# Altium PCB PCB_WeatherStation.PcbDoc (part 2 of 3)
Units mil, origin at the board's own origin, x right, y up, seen from the top; angles counter-clockwise.
Board outline 3900 x 3900 mil, 2 copper layers (Top Layer, Bottom Layer); 99 components, 57 nets, 297 pads, 308 vias.
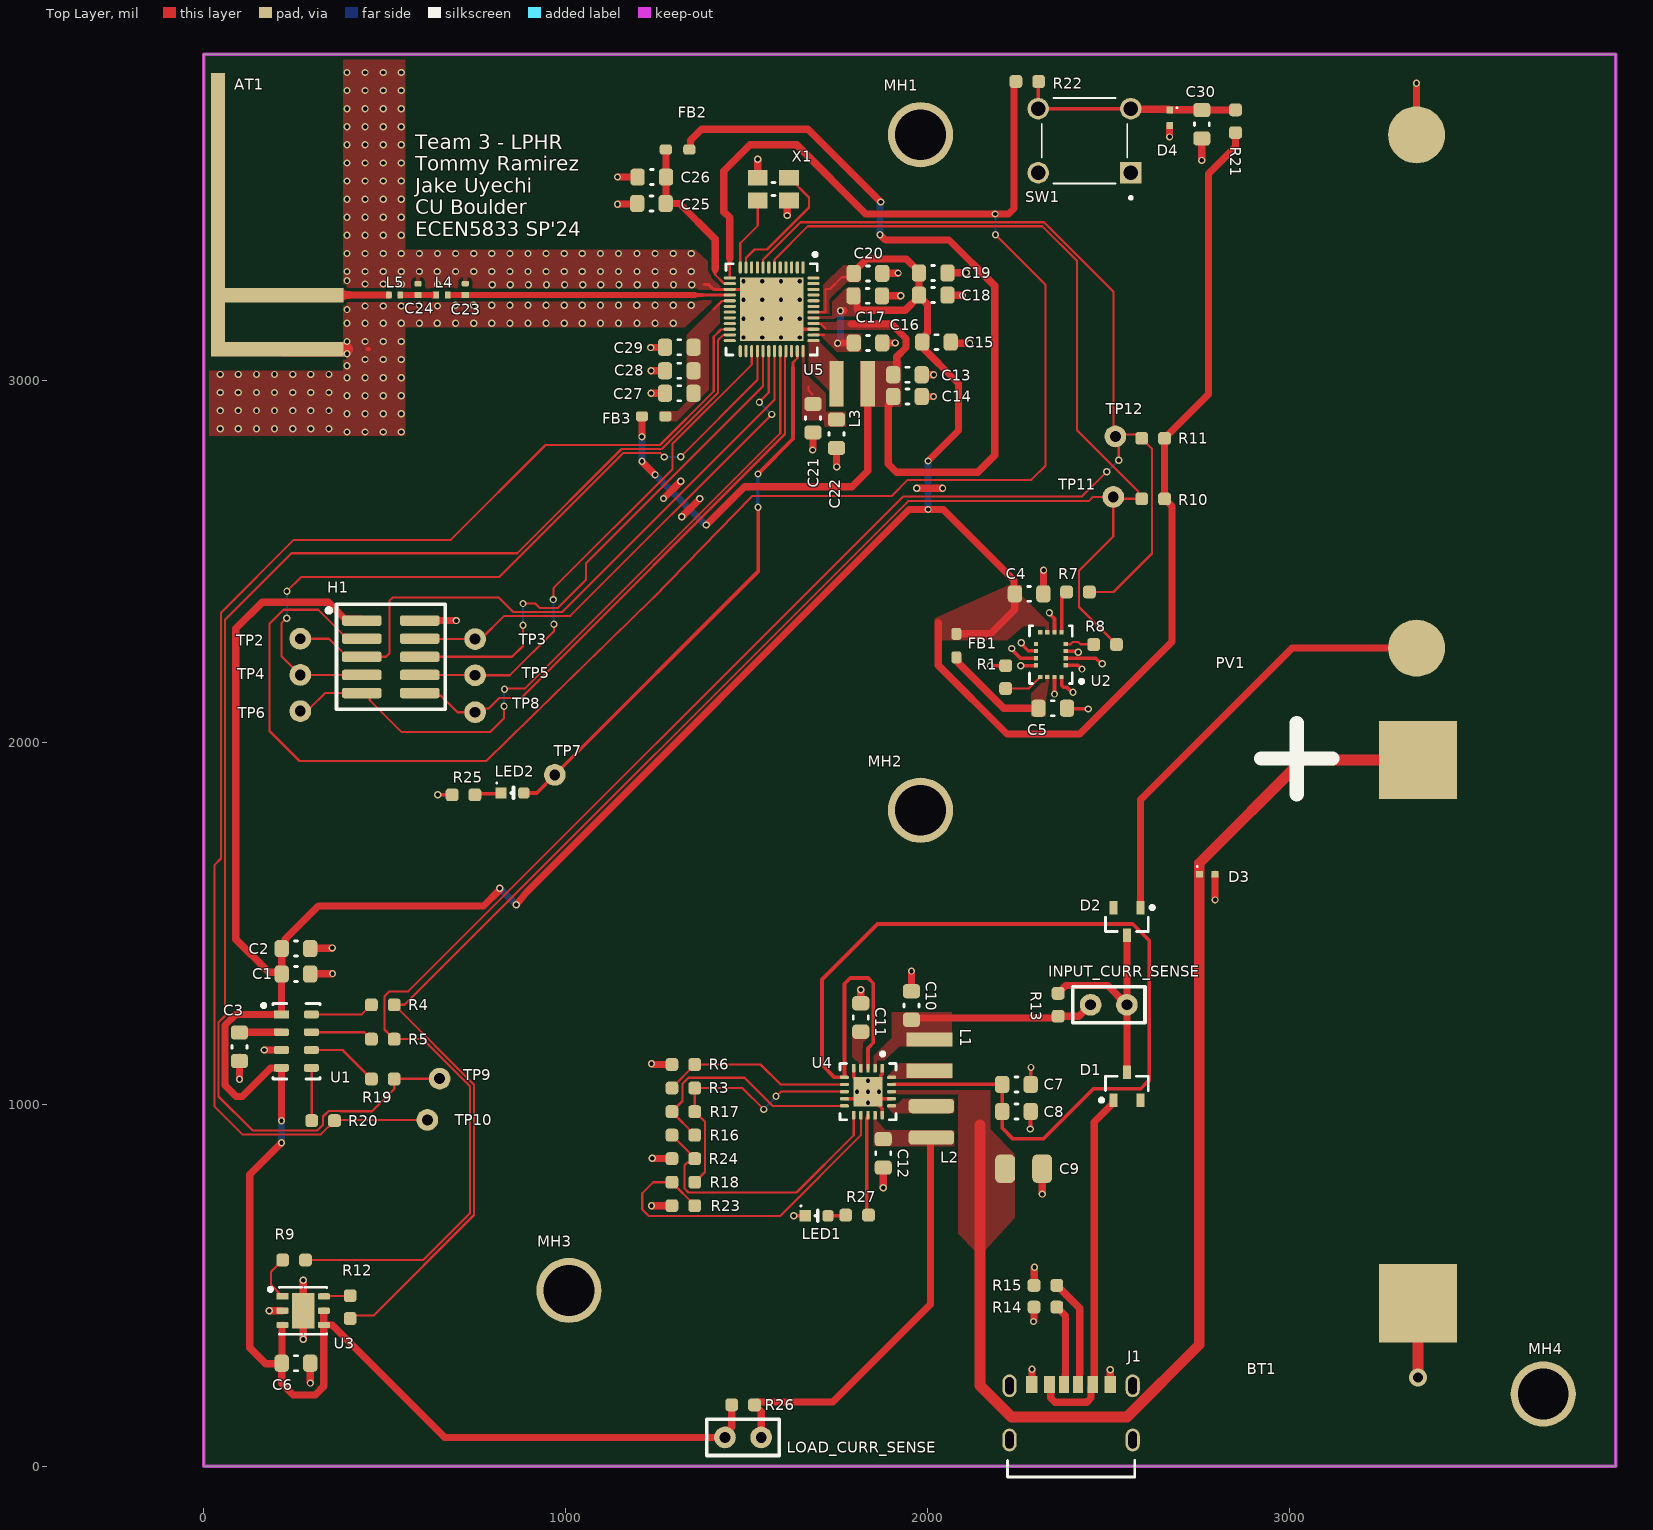
[diagram p0: Top Layer view]

## Part data (continued)
L1: library part L_22U_2828, "General Purpose Inductor, 22uH, 20%, 1 Element, Ferrite-Core, SMD, 1111", Case/Size Code=1111, DC Resistance (DCR)=575mR, Inductance-Nom (L)=22uH, Inductor Application="RF INDUCTOR", Inductor Type="GENERAL PURPOSE INDUCTOR", Manufacturer="Wurth Electronics", Manufacturer Part Number=744025220, Max Current Rating=500mA, Max Operating Temperature=125°C, Min Operating Temperature=-40°C, Package Height=2.8mm, Package Style=SMTMeter, Self Resonant Frequency=23MHz, Supplier Part Number=732-2619-1-ND, Test Frequency=100kHz, Tolerance=20%, Category="Fixed Inductors", Channels=1, ComponentLink1Description=https://datasheet.ciiva.com:443/pdfs/VipMasterIC/IC/MIDC/MIDC-S-A0002801275/MIDC-S-A0002801275-1.pdf?src-supplier=IHS+Markit, ComponentLink1URL=https://datasheet.ciiva.com:443/pdfs/VipMasterIC/IC/MIDC/MIDC-S-A0002801275/MIDC-S-A0002801275-1.pdf?src-supplier=IHS+Markit, ComponentLink2Description=https://datasheet.ciiva.com/6697/744025220-6697526.pdf?src-supplier=Digikey, ComponentLink2URL=https://datasheet.ciiva.com/6697/744025220-6697526.pdf?src-supplier=Digikey, ComponentLink3Description=https://datasheet.ciiva.com/4954/744025220-66606-4954805.pdf?src-supplier=Mouser, ComponentLink3URL=https://datasheet.ciiva.com/4954/744025220-66606-4954805.pdf?src-supplier=Mouser, ComponentLink4Description=https://datasheet.ciiva.com/11803/0900766b80f886ba-11803595.pdf?src-supplier=Rs, ComponentLink4URL=https://datasheet.ciiva.com/11803/0900766b80f886ba-11803595.pdf?src-supplier=Rs, ComponentLink5Description=https://datasheet.ciiva.com/6697/744025220-6697527.pdf?src-supplier=Digikey, ComponentLink5URL=https://datasheet.ciiva.com/6697/744025220-6697527.pdf?src-supplier=Digikey, ComponentLink6Description=https://datasheet.ciiva.com/48691/001087107-da-01-ml-we-tpc-smd-speicherdrossel-7440252-de-en-48691031.pdf?src-supplier=Conrad, ComponentLink6URL=https://datasheet.ciiva.com/48691/001087107-da-01-ml-we-tpc-smd-speicherdrossel-7440252-de-en-48691031.pdf?src-supplier=Conrad, Construction=Chip, Core Material=Ferrite, JESD-609 Code=e2, Package Length=2.8mm, Package Width=2.8mm, Packaging="Tape and Reel", Pins=2, Pricing="1=1.64, 10=1.578, 50=1.45, 100=1.205, 250=1.088 (USD)", Reach SVHC Compliant=Yes, RoHS=Yes, RoHS Compliant=Yes, Shape/Size Description="RECTANGULAR PACKAGE", Shielding=Unshielded, Stock=9551, Supplier=Digikey, Surface Mount=Yes, Terminal Finish=Copper, Terminal Placement="Dual Ended", Termination=Wraparound
L2: library part L_10U_2828, "General Purpose Inductor, 10uH, 30%, 1 Element, Ferrite-Core, SMD, 1111", Case/Size Code=1111, DC Resistance (DCR)=470mR, Inductance-Nom (L)=10uH, Inductor Application="POWER INDUCTOR", Inductor Type="GENERAL PURPOSE INDUCTOR", Manufacturer="Wurth Electronics", Manufacturer Part Number=744029100, Max Current Rating=750mA, Max Operating Temperature=125°C, Min Operating Temperature=-40°C, Package Height=1.35mm, Package Length=2.8mm, Package Style=SMTMeter, Self Resonant Frequency=40MHz, Supplier Part Number=732-1091-1-ND, Test Frequency=100kHz, Tolerance=30%, Category="Fixed Inductors", Channels=1, ComponentLink1Description=https://datasheet.ciiva.com:443/pdfs/VipMasterIC/IC/MIDC/MIDC-S-A0002801410/MIDC-S-A0002801335-1.pdf?src-supplier=IHS+Markit, ComponentLink1URL=https://datasheet.ciiva.com:443/pdfs/VipMasterIC/IC/MIDC/MIDC-S-A0002801410/MIDC-S-A0002801335-1.pdf?src-supplier=IHS+Markit, ComponentLink2Description=https://datasheet.ciiva.com/6700/744029100-6700264.pdf?src-supplier=Digikey, ComponentLink2URL=https://datasheet.ciiva.com/6700/744029100-6700264.pdf?src-supplier=Digikey, ComponentLink3Description=https://datasheet.ciiva.com/5975/69360-5975061.pdf?src-supplier=Farnell, ComponentLink3URL=https://datasheet.ciiva.com/5975/69360-5975061.pdf?src-supplier=Farnell, ComponentLink4Description=https://datasheet.ciiva.com/4961/744029100-81254-4961409.pdf?src-supplier=Mouser, ComponentLink4URL=https://datasheet.ciiva.com/4961/744029100-81254-4961409.pdf?src-supplier=Mouser, ComponentLink5Description=https://datasheet.ciiva.com/11802/0900766b80d7f1cc-11802020.pdf?src-supplier=Rs, ComponentLink5URL=https://datasheet.ciiva.com/11802/0900766b80d7f1cc-11802020.pdf?src-supplier=Rs, ComponentLink6Description=https://datasheet.ciiva.com/6700/744029100-6700266.pdf?src-supplier=Digikey, ComponentLink6URL=https://datasheet.ciiva.com/6700/744029100-6700266.pdf?src-supplier=Digikey, ComponentLink7Description=https://datasheet.ciiva.com/7892/69360-7892549.pdf?src-supplier=Element14, ComponentLink7URL=https://datasheet.ciiva.com/7892/69360-7892549.pdf?src-supplier=Element14, ComponentLink8Description=https://datasheet.ciiva.com/22702/69360-22702631.pdf?src-supplier=Element14, ComponentLink8URL=https://datasheet.ciiva.com/22702/69360-22702631.pdf?src-supplier=Element14, Construction=Chip, Core Material=Ferrite, JESD-609 Code=e3, Package Width=2.8mm, Packaging="Tape and Reel", Pins=2, Pricing="1=1.53, 10=1.481, 50=1.296, 100=1.222, 500=1.044 (USD)", Reach SVHC Compliant=Yes, RoHS=Yes, RoHS Compliant=Yes, Shape/Size Description="RECTANGULAR PACKAGE", Shielding=Unshielded, Stock=33276, Supplier=Digikey, Surface Mount=Yes, Terminal Finish=Tin, Terminal Placement="Dual Ended", Termination="One Surface"
L3: library part L_2U2_2828, "General Purpose Inductor, 2.2uH, 20%, 1 Element, Ferrite-Core, SMD, 1111", Case/Size Code=1111, DC Resistance (DCR)=101mR, Inductor Application="RF INDUCTOR", Inductor Type="GENERAL PURPOSE INDUCTOR", Manufacturer="Wurth Electronics", Manufacturer Part Number=744025002, Max Current Rating=1.5A, Max Operating Temperature=125°C, Min Operating Temperature=-40°C, Package Height=2.8mm, Package Style=SMTMeter, Self Resonant Frequency=100MHz, Supplier Part Number=732-2613-1-ND, Test Frequency=100kHz, Tolerance=20%, Category="Fixed Inductors", Channels=1, ComponentLink1Description=https://datasheet.ciiva.com:443/pdfs/VipMasterIC/IC/MIDC/MIDC-S-A0002801410/MIDC-S-A0002801309-1.pdf?src-supplier=IHS+Markit, ComponentLink1URL=https://datasheet.ciiva.com:443/pdfs/VipMasterIC/IC/MIDC/MIDC-S-A0002801410/MIDC-S-A0002801309-1.pdf?src-supplier=IHS+Markit, ComponentLink2Description=https://datasheet.ciiva.com/4954/744025002-18097-4954597.pdf?src-supplier=Mouser, ComponentLink2URL=https://datasheet.ciiva.com/4954/744025002-18097-4954597.pdf?src-supplier=Mouser, ComponentLink3Description=https://datasheet.ciiva.com/6690/744025002-6690395.pdf?src-supplier=Digikey, ComponentLink3URL=https://datasheet.ciiva.com/6690/744025002-6690395.pdf?src-supplier=Digikey, ComponentLink4Description=https://datasheet.ciiva.com/11803/0900766b80f886b4-11803596.pdf?src-supplier=Rs, ComponentLink4URL=https://datasheet.ciiva.com/11803/0900766b80f886b4-11803596.pdf?src-supplier=Rs, ComponentLink5Description=https://datasheet.ciiva.com/6690/744025002-6690396.pdf?src-supplier=Digikey, ComponentLink5URL=https://datasheet.ciiva.com/6690/744025002-6690396.pdf?src-supplier=Digikey, ComponentLink6Description=https://datasheet.ciiva.com/6690/744025002-6690397.pdf?src-supplier=Digikey, ComponentLink6URL=https://datasheet.ciiva.com/6690/744025002-6690397.pdf?src-supplier=Digikey, ComponentLink7Description=https://datasheet.ciiva.com/48690/001087101-da-01-ml-we-tpc-smd-speicherdrossel-7440250-de-en-48690919.pdf?src-supplier=Conrad, ComponentLink7URL=https://datasheet.ciiva.com/48690/001087101-da-01-ml-we-tpc-smd-speicherdrossel-7440250-de-en-48690919.pdf?src-supplier=Conrad, Construction=Chip, Core Material=Ferrite, Inductance-Nom (L)=2.2uH, JESD-609 Code=e2, Package Length=2.8mm, Package Width=2.8mm, Packaging="Tape and Reel", Pins=2, Pricing="1=1.64, 10=1.578, 50=1.45, 100=1.205, 250=1.088 (USD)", Reach SVHC Compliant=Yes, RoHS=Yes, RoHS Compliant=Yes, Shape/Size Description="RECTANGULAR PACKAGE", Shielding=Unshielded, Stock=733, Supplier=Digikey, Surface Mount=Yes, Terminal Finish=Copper, Terminal Placement="Dual Ended", Termination=Wraparound
L4: library part L_2N9_0402, "General Purpose Inductor, 0.0029uH, 10.345%, 1 Element, SMD, 0402", Manufacturer=Murata, Manufacturer Part Number=LQG15WZ2N9S02D, Supplier Part Number=490-LQG15WZ2N9S02DCT-ND, Category="Fixed Inductors", Pricing="1=0.12, 10=0.099, 25=0.0912, 50=0.0804, 100=0.0703, 250=0.06696, 500=0.06294, 1000=0.0482, 2500=0.04553 (USD)", RoHS=Yes, Stock=19729, Supplier=Digikey
L5: library part L_1N2_0402, "General Purpose Inductor, 0.0012uH, 8.333%, 1 Element, SMD, 0402", DC Resistance (DCR)=70mR, Inductance-Nom (L)=0.0012uH, Inductor Application="RF INDUCTOR", Inductor Type="GENERAL PURPOSE INDUCTOR", Manufacturer=Murata, Manufacturer Part Number=LQG15HS1N2B02D, Max Current Rating=1A, Max Operating Temperature=125°C, Min Operating Temperature=-55°C, Self Resonant Frequency=6GHz, Supplier Part Number=490-LQG15HS1N2B02DCT-ND, Test Frequency=100MHz, Tolerance=8.333%, Category="Fixed Inductors", Channels=1, ComponentLink1Description=https://psearch.en.murata.com:443/inductor/product/LQG15HS1N2B02_.pdf?src-supplier=IHS+Markit, ComponentLink1URL=https://psearch.en.murata.com:443/inductor/product/LQG15HS1N2B02_.pdf?src-supplier=IHS+Markit, JESD-609 Code=e3, Pins=2, Pricing="1=0.1, 10=0.065, 25=0.0596, 50=0.0526, 100=0.046, 250=0.04376, 500=0.04114, 1000=0.03152, 2500=0.02977 (USD)", Quality Factor-Min (at L-nom)=8, Reach SVHC Compliant=Yes, RoHS=Yes, RoHS Compliant=Yes, Shape/Size Description="RECTANGULAR PACKAGE", Shielding=Unshielded, Stock=9740, Supplier=Digikey, Surface Mount=Yes, Terminal Finish=Tin, Terminal Placement="Dual Ended", Termination=Wraparound
LED1 LED2: library part LED_GREEN_0603, "LED, 0603, GREEN, 430MCD, 520NM", Color=Green, Current - Test=20mA, Manufacturer="Wurth Electronics", Manufacturer Part Number=150060GS75000, Millicandela Rating=430mcd, Package / Case="0603 (1608 Metric)", Standard Package=4,000, Supplier Part Number 1=732-4971-1-ND, Voltage - Forward (Vf) (Typ)=3.2V, 3D Model="SMCW_0603.igs /  / SMCW_0603.stp /  / SMCW_0603.wrl", Category=Optoelectronics, ComponentLink1Description=https://katalog.we-online.de/led/datasheet/150060GS75000.pdf?src-supplier=Digi-Key, ComponentLink1URL=https://katalog.we-online.de/led/datasheet/150060GS75000.pdf?src-supplier=Digi-Key, ComponentLink2Description=http://www.produktinfo.conrad.com/datenblaetter/750000-774999/759427-da-01-en-CHIPLED_0603_W_KL_GRUEN_150060GS75000.pdf?src-supplier=Conrad, ComponentLink2URL=http://www.produktinfo.conrad.com/datenblaetter/750000-774999/759427-da-01-en-CHIPLED_0603_W_KL_GRUEN_150060GS75000.pdf?src-supplier=Conrad, Dynamic Catalog="0603 Rectangle with Flat Top Chip LEDs", Family="LED Indication - Discrete", Height=0.70mm, Lens Style/Size="Rectangle with Flat Top, 1.1mm x 0.7mm", Lens Type=Clear, Mounting Type="Surface Mount", Online Catalog="0603 Rectangle with Flat Top Chip LEDs", Other Names=732-4971-2, Packaging="Tape & Reel (TR)", Pricing 1="1=0.14, 50=0.129, 100=0.11, 500=0.095 (USD)", Series=WL-SMCW, Size / Dimension="1.60mm L x 0.80mm W", Stock 1=34964, Supplier 1=Digi-Key, Viewing Angle=140°, Wavelength - Dominant=520nm, Wavelength - Peak=515nm
MH1 MH2 MH3 MH4: library part HOLE_#4
PV1: library part PV_4.15V, "Monocryst Solar Cell 184MW 4.15V", Manufacturer=ANYSOLAR, Manufacturer Part Number=SM141K06L, Supplier Part Number=SM141K06L-ND, Category=Uncategorized, Pricing="1=6.3, 25=4.9996, 50=4.7572, 100=4.545, 250=4.242, 500=4.0299 (USD)", RoHS=No, Stock=2333, Supplier=Digikey
R1: library part R_3.3M_0603, "RES 3.3MOHM 0.1W 0603", Case/Package=0603, Manufacturer=Yageo, Manufacturer Part Number=RC0603FR-073M3L, Max Operating Temperature=155°C, Min Operating Temperature=-55°C, Package Height=0.45mm, Package Length=1.6mm, Package Shape=Rectangular, Package Style=SMTMeter, Package Width=0.8mm, Power=100mW, Rated Temperature=70°C, Resistor Type="FIXED RESISTOR", Supplier Part Number=13-RC0603FR-073M3LCT-ND, Temperature Coefficient=100ppm/°C, Tolerance=1%, Working Voltage=75V, Additional Feature="LASER TRIMMABLE", Category="Chip SMD Resistors", ComponentLink1Description=https://datasheet.ciiva.com:443/pdfs/VipMasterIC/IC/YAGO/YAGO-S-A0008145938/YAGO-S-A0008145938-1.pdf?src-supplier=IHS+Markit, ComponentLink1URL=https://datasheet.ciiva.com:443/pdfs/VipMasterIC/IC/YAGO/YAGO-S-A0008145938/YAGO-S-A0008145938-1.pdf?src-supplier=IHS+Markit, ComponentLink2Description=https://datasheet.ciiva.com/7746/443971-7746349.pdf?src-supplier=Element14, ComponentLink2URL=https://datasheet.ciiva.com/7746/443971-7746349.pdf?src-supplier=Element14, ComponentLink3Description=https://datasheet.ciiva.com/7746/443971-7746350.pdf?src-supplier=Element14, ComponentLink3URL=https://datasheet.ciiva.com/7746/443971-7746350.pdf?src-supplier=Element14, Construction=Chip, JESD-609 Code=e3, Mounting Technology="Surface Mount", Packaging="Tape and Reel", Pins=2, Pricing="1=0.1, 10=0.019, 50=0.0112, 100=0.0093, 500=0.00622, 1000=0.00532 (USD)", Reach SVHC Compliant=Yes, RoHS=Yes, RoHS Compliant=Yes, Stock=44730, Supplier=Digikey, Technology="METAL GLAZE/THICK FILM", Terminal Finish=Nickel, Termination=Wraparound
R3: library part R_7M32_0603, "Fixed Resistor, Metal Glaze/thick Film, 0.1W, 7320000ohm, 75V, 1% +/-Tol, 100ppm/Cel, Surface Mount, 0603", Case/Package=0603, Manufacturer=Vishay, Manufacturer Part Number=CRCW06037M32FKEA, Max Operating Temperature=155°C, Min Operating Temperature=-55°C, Package Height=0.45mm, Package Length=1.55mm, Package Shape=Rectangular, Package Style=SMTMeter, Package Width=0.85mm, Power=100mW, Rated Temperature=70°C, Resistor Type="FIXED RESISTOR", Supplier Part Number=541-7.32MHCT-ND, Temperature Coefficient=100ppm/°C, Tolerance=1%, Working Voltage=75V, Category="Chip SMD Resistors", ComponentLink1Description=https://datasheet.ciiva.com:443/pdfs/VipMasterIC/IC/VISH/VISH-S-A0007266705/VISH-S-A0007266705-1.pdf?src-supplier=IHS+Markit, ComponentLink1URL=https://datasheet.ciiva.com:443/pdfs/VipMasterIC/IC/VISH/VISH-S-A0007266705/VISH-S-A0007266705-1.pdf?src-supplier=IHS+Markit, ComponentLink2Description=https://datasheet.ciiva.com/5588/dcrcwe3-109170-5588998.pdf?src-supplier=Mouser, ComponentLink2URL=https://datasheet.ciiva.com/5588/dcrcwe3-109170-5588998.pdf?src-supplier=Mouser, ComponentLink3Description=https://datasheet.ciiva.com/22676/1700796-22676479.pdf?src-supplier=Element14, ComponentLink3URL=https://datasheet.ciiva.com/22676/1700796-22676479.pdf?src-supplier=Element14, ComponentLink4Description=https://datasheet.ciiva.com/2525/dcrcwe3-2525464.pdf?src-supplier=Digikey, ComponentLink4URL=https://datasheet.ciiva.com/2525/dcrcwe3-2525464.pdf?src-supplier=Digikey, ComponentLink5Description=https://datasheet.ciiva.com/2525/dcrcwe3-2525465.pdf?src-supplier=Digikey, ComponentLink5URL=https://datasheet.ciiva.com/2525/dcrcwe3-2525465.pdf?src-supplier=Digikey, ComponentLink6Description=https://datasheet.ciiva.com/2525/dcrcwe3-2525466.pdf?src-supplier=Digikey, ComponentLink6URL=https://datasheet.ciiva.com/2525/dcrcwe3-2525466.pdf?src-supplier=Digikey, Construction=Chip, JESD-609 Code=e3, Mounting Technology="Surface Mount", Packaging="Tape and Reel", Pins=2, Pricing="1=0.1, 10=0.026, 50=0.0166, 100=0.014, 500=0.00954, 1000=0.00824 (USD)", Reach SVHC Compliant=Yes, Reference Standard=AEC-Q200, RoHS=Yes, RoHS Compliant=Yes, Stock=19410, Supplier=Digikey, Technology="METAL GLAZE/THICK FILM", Terminal Finish=Nickel, Termination=Wraparound
R4 R5 R7 R8 R9 R12 R19 R20: library part R_0_0603, "RES 0OHM 0.1W 0603", Case/Package=0603, Manufacturer="Stackpole Electronics", Manufacturer Part Number=RMCF0603ZT0R00, Max Operating Temperature=155°C, Min Operating Temperature=-55°C, Package Height=0.45mm, Package Length=1.55mm, Package Shape=Rectangular, Package Style=SMTMeter, Package Width=0.8mm, Power=100mW, Rated Temperature=70°C, Resistor Type="FIXED RESISTOR", Supplier Part Number=RMCF0603ZT0R00CT-ND, Working Voltage=75V, Category="Chip SMD Resistors", ComponentLink1Description=https://datasheet.ciiva.com:443/pdfs/VipMasterIC/IC/SEIE/SEIE-S-A0007077258/SEIE-S-A0007077258-1.pdf?src-supplier=IHS+Markit, ComponentLink1URL=https://datasheet.ciiva.com:443/pdfs/VipMasterIC/IC/SEIE/SEIE-S-A0007077258/SEIE-S-A0007077258-1.pdf?src-supplier=IHS+Markit, ComponentLink2Description=https://datasheet.octopart.com/RMCF0603ZT0R00-Stackpole-Electronics-datasheet-11547379.pdf?src-supplier=Future+Electronics, ComponentLink2URL=https://datasheet.octopart.com/RMCF0603ZT0R00-Stackpole-Electronics-datasheet-11547379.pdf?src-supplier=Future+Electronics, ComponentLink3Description=https://www.seielect.com/catalog/SEI-Packaging.pdf?src-supplier=Avnet, ComponentLink3URL=https://www.seielect.com/catalog/SEI-Packaging.pdf?src-supplier=Avnet, ComponentLink4Description=https://www.seielect.com/catalog/SEI-Packaging.pdf?src-supplier=Arrow+Electronics, ComponentLink4URL=https://www.seielect.com/catalog/SEI-Packaging.pdf?src-supplier=Arrow+Electronics, ComponentLink5Description=https://www.seielect.com/catalog/SEI-Packaging.pdf?src-supplier=Verical, ComponentLink5URL=https://www.seielect.com/catalog/SEI-Packaging.pdf?src-supplier=Verical, ComponentLink6Description=https://datasheet.octopart.com/RMCF0603ZT0R00-Stackpole-Electronics-datasheet-154799224.pdf?src-supplier=Master+Electronics, ComponentLink6URL=https://datasheet.octopart.com/RMCF0603ZT0R00-Stackpole-Electronics-datasheet-154799224.pdf?src-supplier=Master+Electronics, Construction=Rectangular, JESD-609 Code=e3, Mounting Technology="Surface Mount", Packaging="Tape and Reel", Pins=2, Pricing="1=0.1, 10=0.013, 25=0.0096, 50=0.0072, 100=0.0051, 250=0.00408, 500=0.00328, 1000=0.00241 (USD)", Reach SVHC Compliant=Yes, Reference Standard=AEC-Q200, RoHS=Yes, RoHS Compliant=Yes, Stock=13173551, Supplier=Digikey, Technology="METAL GLAZE/THICK FILM", Terminal Finish=Nickel, Termination=Wraparound
R6: library part R_5M62_0603, "Fixed Resistor, Metal Glaze/thick Film, 0.1W, 5620000ohm, 75V, 1% +/-Tol, 100ppm/Cel, Surface Mount, 0603", Case/Package=0603, Manufacturer=Vishay, Manufacturer Part Number=CRCW06035M62FKEA, Max Operating Temperature=155°C, Min Operating Temperature=-55°C, Package Height=0.45mm, Package Length=1.55mm, Package Shape=Rectangular, Package Style=SMTMeter, Package Width=0.85mm, Power=100mW, Rated Temperature=70°C, Resistor Type="FIXED RESISTOR", Supplier Part Number=541-5.62MHCT-ND, Temperature Coefficient=100ppm/°C, Tolerance=1%, Working Voltage=75V, Category="Chip SMD Resistors", ComponentLink1Description=https://datasheet.ciiva.com:443/pdfs/VipMasterIC/IC/VISH/VISH-S-A0007266705/VISH-S-A0007266705-1.pdf?src-supplier=IHS+Markit, ComponentLink1URL=https://datasheet.ciiva.com:443/pdfs/VipMasterIC/IC/VISH/VISH-S-A0007266705/VISH-S-A0007266705-1.pdf?src-supplier=IHS+Markit, ComponentLink2Description=https://datasheet.ciiva.com/7748/1697337-7748679.pdf?src-supplier=Element14, ComponentLink2URL=https://datasheet.ciiva.com/7748/1697337-7748679.pdf?src-supplier=Element14, ComponentLink3Description=https://datasheet.ciiva.com/7748/1697337-7748680.pdf?src-supplier=Element14, ComponentLink3URL=https://datasheet.ciiva.com/7748/1697337-7748680.pdf?src-supplier=Element14, ComponentLink4Description=https://datasheet.ciiva.com/22675/1700796-22675468.pdf?src-supplier=Element14, ComponentLink4URL=https://datasheet.ciiva.com/22675/1700796-22675468.pdf?src-supplier=Element14, ComponentLink5Description=https://datasheet.ciiva.com/22675/1700796-22675469.pdf?src-supplier=Element14, ComponentLink5URL=https://datasheet.ciiva.com/22675/1700796-22675469.pdf?src-supplier=Element14, ComponentLink6Description=https://datasheet.ciiva.com/22700/1697337-22700634.pdf?src-supplier=Element14, ComponentLink6URL=https://datasheet.ciiva.com/22700/1697337-22700634.pdf?src-supplier=Element14, ComponentLink7Description=https://datasheet.ciiva.com/5546/dcrcwe3-109170-5546746.pdf?src-supplier=Mouser, ComponentLink7URL=https://datasheet.ciiva.com/5546/dcrcwe3-109170-5546746.pdf?src-supplier=Mouser, ComponentLink8Description=https://datasheet.ciiva.com/9065/dcrcwe3-9065258.pdf?src-supplier=Avnet, ComponentLink8URL=https://datasheet.ciiva.com/9065/dcrcwe3-9065258.pdf?src-supplier=Avnet, ComponentLink9Description=https://datasheet.ciiva.com/2525/dcrcwe3-2525255.pdf?src-supplier=Digikey, ComponentLink9URL=https://datasheet.ciiva.com/2525/dcrcwe3-2525255.pdf?src-supplier=Digikey, ComponentLink10Description=https://datasheet.ciiva.com/2525/dcrcwe3-2525256.pdf?src-supplier=Digikey, ComponentLink10URL=https://datasheet.ciiva.com/2525/dcrcwe3-2525256.pdf?src-supplier=Digikey, ComponentLink11Description=https://datasheet.ciiva.com/2525/dcrcwe3-2525254.pdf?src-supplier=Digikey, ComponentLink11URL=https://datasheet.ciiva.com/2525/dcrcwe3-2525254.pdf?src-supplier=Digikey, Construction=Chip, JESD-609 Code=e3, Mounting Technology="Surface Mount", Packaging="Tape and Reel", Pins=2, Pricing="1=0.1, 10=0.026, 50=0.0166, 100=0.0139, 500=0.0095, 1000=0.00821 (USD)", Reach SVHC Compliant=Yes, Reference Standard=AEC-Q200, RoHS=Yes, RoHS Compliant=Yes, Stock=27479, Supplier=Digikey, Technology="METAL GLAZE/THICK FILM", Terminal Finish=Nickel, Termination=Wraparound
R10 R11: library part R_4K7_0603, "Fixed Resistor, Metal Glaze/thick Film, 0.1W, 4700ohm, 75V, 1% +/-Tol, 100ppm/Cel, Surface Mount, 0603", Case/Package=0603, Manufacturer=Yageo, Manufacturer Part Number=RC0603FR-074K7L, Max Operating Temperature=155°C, Min Operating Temperature=-55°C, Package Height=0.45mm, Package Length=1.6mm, Package Shape=Rectangular, Package Style=SMTMeter, Package Width=0.8mm, Power=100mW, Rated Temperature=70°C, Resistor Type="FIXED RESISTOR", Supplier Part Number=311-4.70KHRCT-ND, Temperature Coefficient=100ppm/°C, Tolerance=1%, Working Voltage=75V, Additional Feature="LASER TRIMMABLE", Category="Chip SMD Resistors", ComponentLink1Description=https://datasheet.ciiva.com:443/pdfs/VipMasterIC/IC/YAGO/YAGO-S-A0008145938/YAGO-S-A0008145938-1.pdf?src-supplier=IHS+Markit, ComponentLink1URL=https://datasheet.ciiva.com:443/pdfs/VipMasterIC/IC/YAGO/YAGO-S-A0008145938/YAGO-S-A0008145938-1.pdf?src-supplier=IHS+Markit, ComponentLink2Description=https://datasheet.ciiva.com/15189/getdatasheetpartid-422754-15189760.pdf?src-supplier=Verical, ComponentLink2URL=https://datasheet.ciiva.com/15189/getdatasheetpartid-422754-15189760.pdf?src-supplier=Verical, ComponentLink3Description=https://datasheet.ciiva.com/7660/38590-7660794.pdf?src-supplier=Element14, ComponentLink3URL=https://datasheet.ciiva.com/7660/38590-7660794.pdf?src-supplier=Element14, ComponentLink4Description=https://datasheet.ciiva.com/22747/443971-22747528.pdf?src-supplier=Element14, ComponentLink4URL=https://datasheet.ciiva.com/22747/443971-22747528.pdf?src-supplier=Element14, ComponentLink5Description=https://datasheet.ciiva.com/46440/1868787-46440909.pdf?src-supplier=Element14, ComponentLink5URL=https://datasheet.ciiva.com/46440/1868787-46440909.pdf?src-supplier=Element14, ComponentLink6Description=https://datasheet.ciiva.com/7746/1868787-7746365.pdf?src-supplier=Element14, ComponentLink6URL=https://datasheet.ciiva.com/7746/1868787-7746365.pdf?src-supplier=Element14, ComponentLink7Description=https://datasheet.ciiva.com/7746/1738695-7746366.pdf?src-supplier=Element14, ComponentLink7URL=https://datasheet.ciiva.com/7746/1738695-7746366.pdf?src-supplier=Element14, Construction=Chip, JESD-609 Code=e3, Mounting Technology="Surface Mount", Packaging="Tape and Reel", Pins=2, Pricing="1=0.1, 10=0.019, 50=0.0112, 100=0.0093, 500=0.00622, 1000=0.00532 (USD)", Reach SVHC Compliant=Yes, RoHS=Yes, RoHS Compliant=Yes, Stock=5392197, Supplier=Digikey, Technology="METAL GLAZE/THICK FILM", Terminal Finish=Nickel, Termination=Wraparound
R13 R26: library part R_500m_0603, "Fixed Resistor, Metal Glaze/thick Film, 0.1W, 0.5ohm, 5% +/-Tol, 800ppm/Cel, Surface Mount, 0603", Case/Package=0603, Manufacturer=Yageo, Manufacturer Part Number=RL0603JR-070R5L, Max Operating Temperature=125°C, Min Operating Temperature=-55°C, Package Height=0.45mm, Package Length=1.6mm, Package Shape=Rectangular, Package Style=SMTMeter, Package Width=0.8mm, Power=100mW, Rated Temperature=70°C, Resistor Type="FIXED RESISTOR", Supplier Part Number=13-RL0603JR-070R5LCT-ND, Temperature Coefficient=800ppm/°C, Tolerance=5%, Additional Feature="LASER TRIMMABLE", Category="Chip SMD Resistors", ComponentLink1Description=https://datasheet.ciiva.com:443/pdfs/VipMasterIC/IC/YAGO/YAGO-S-A0001508779/YAGO-S-A0001508779-1.pdf?src-supplier=IHS+Markit, ComponentLink1URL=https://datasheet.ciiva.com:443/pdfs/VipMasterIC/IC/YAGO/YAGO-S-A0001508779/YAGO-S-A0001508779-1.pdf?src-supplier=IHS+Markit, ComponentLink2Description=http://www.mouser.com/ds/2/447/PYu-RL_521_RoHS_L_5-2927.pdf?src-supplier=Mouser, ComponentLink2URL=http://www.mouser.com/ds/2/447/PYu-RL_521_RoHS_L_5-2927.pdf?src-supplier=Mouser, ComponentLink3Description=http://www.yageo.com/documents/recent/PYu-RL_Group_521_RoHS_L_2.pdf?src-supplier=Digikey, ComponentLink3URL=http://www.yageo.com/documents/recent/PYu-RL_Group_521_RoHS_L_2.pdf?src-supplier=Digikey, Construction=Chip, JESD-609 Code=e3, Mounting Technology="Surface Mount", Packaging="Tape and Reel", Pins=2, Pricing="1=0.24, 10=0.121, 50=0.0812, 100=0.0692, 500=0.04966, 1000=0.04371 (USD)", Reach SVHC Compliant=Yes, RoHS=Yes, RoHS Compliant=Yes, Series=RL, Stock=16696, Supplier=Digikey, Technology="METAL GLAZE/THICK FILM", Terminal Finish=Nickel, Termination=Wraparound
R14 R15: library part R_5K1_0603, "Fixed Resistor, Metal Glaze/thick Film, 0.1W, 5100ohm, 75V, 1% +/-Tol, 100ppm/Cel, Surface Mount, 0603", Case/Package=0603, Manufacturer=Yageo, Manufacturer Part Number=RC0603FR-075K1L, Max Operating Temperature=155°C, Min Operating Temperature=-55°C, Package Height=0.45mm, Package Length=1.6mm, Package Shape=Rectangular, Package Style=SMTMeter, Package Width=0.8mm, Power=100mW, Rated Temperature=70°C, Resistor Type="FIXED RESISTOR", Supplier Part Number=311-5.10KHRCT-ND, Temperature Coefficient=100ppm/°C, Tolerance=1%, Working Voltage=75V, Additional Feature="LASER TRIMMABLE", Category="Chip SMD Resistors", ComponentLink1Description=https://datasheet.ciiva.com:443/pdfs/VipMasterIC/IC/YAGO/YAGO-S-A0008145938/YAGO-S-A0008145938-1.pdf?src-supplier=IHS+Markit, ComponentLink1URL=https://datasheet.ciiva.com:443/pdfs/VipMasterIC/IC/YAGO/YAGO-S-A0008145938/YAGO-S-A0008145938-1.pdf?src-supplier=IHS+Markit, ComponentLink2Description=https://datasheet.ciiva.com/46395/443971-46395016.pdf?src-supplier=Element14, ComponentLink2URL=https://datasheet.ciiva.com/46395/443971-46395016.pdf?src-supplier=Element14, ComponentLink3Description=https://datasheet.ciiva.com/2454/pyu-r-int-thick-7-2454046.pdf?src-supplier=Digikey, ComponentLink3URL=https://datasheet.ciiva.com/2454/pyu-r-int-thick-7-2454046.pdf?src-supplier=Digikey, ComponentLink4Description=https://datasheet.ciiva.com/2454/pyu-r-int-thick-7-2454047.pdf?src-supplier=Digikey, ComponentLink4URL=https://datasheet.ciiva.com/2454/pyu-r-int-thick-7-2454047.pdf?src-supplier=Digikey, ComponentLink5Description=https://datasheet.ciiva.com/2454/pyu-r-int-thick-7-2454045.pdf?src-supplier=Digikey, ComponentLink5URL=https://datasheet.ciiva.com/2454/pyu-r-int-thick-7-2454045.pdf?src-supplier=Digikey, ComponentLink6Description=https://datasheet.ciiva.com/15189/getdatasheetpartid-326732-15189786.pdf?src-supplier=Verical, ComponentLink6URL=https://datasheet.ciiva.com/15189/getdatasheetpartid-326732-15189786.pdf?src-supplier=Verical, Construction=Chip, JESD-609 Code=e3, Mounting Technology="Surface Mount", Packaging="Tape and Reel", Pins=2, Pricing="1=0.1, 10=0.019, 50=0.0112, 100=0.0093, 500=0.00622, 1000=0.00532 (USD)", Reach SVHC Compliant=Yes, RoHS=Yes, RoHS Compliant=Yes, Stock=2600731, Supplier=Digikey, Technology="METAL GLAZE/THICK FILM", Terminal Finish=Nickel, Termination=Wraparound
R16: library part R_7M5_0603, "Fixed Resistor, Metal Glaze/thick Film, 0.1W, 7500000ohm, 75V, 1% +/-Tol, 100ppm/Cel, Surface Mount, 0603", Case/Package=0603, Manufacturer=Vishay, Manufacturer Part Number=CRCW06037M50FKEA, Max Operating Temperature=155°C, Min Operating Temperature=-55°C, Package Height=0.45mm, Package Length=1.55mm, Package Shape=Rectangular, Package Style=SMTMeter, Package Width=0.85mm, Power=100mW, Rated Temperature=70°C, Resistor Type="FIXED RESISTOR", Supplier Part Number=541-7.50MHCT-ND, Temperature Coefficient=100ppm/°C, Tolerance=1%, Working Voltage=75V, Category="Chip SMD Resistors", ComponentLink1Description=https://datasheet.ciiva.com:443/pdfs/VipMasterIC/IC/VISH/VISH-S-A0007266705/VISH-S-A0007266705-1.pdf?src-supplier=IHS+Markit, ComponentLink1URL=https://datasheet.ciiva.com:443/pdfs/VipMasterIC/IC/VISH/VISH-S-A0007266705/VISH-S-A0007266705-1.pdf?src-supplier=IHS+Markit, ComponentLink2Description=https://datasheet.ciiva.com/5552/dcrcwe3-109170-5552646.pdf?src-supplier=Mouser, ComponentLink2URL=https://datasheet.ciiva.com/5552/dcrcwe3-109170-5552646.pdf?src-supplier=Mouser, ComponentLink3Description=https://datasheet.ciiva.com/22704/1697337-22704015.pdf?src-supplier=Element14, ComponentLink3URL=https://datasheet.ciiva.com/22704/1697337-22704015.pdf?src-supplier=Element14, ComponentLink4Description=https://datasheet.ciiva.com/16784/70201119-16784828.pdf?src-supplier=Allied+Electronics, ComponentLink4URL=https://datasheet.ciiva.com/16784/70201119-16784828.pdf?src-supplier=Allied+Electronics, ComponentLink5Description=https://datasheet.ciiva.com/22869/70201119-22869559.pdf?src-supplier=Allied+Electronics, ComponentLink5URL=https://datasheet.ciiva.com/22869/70201119-22869559.pdf?src-supplier=Allied+Electronics, ComponentLink6Description=https://datasheet.ciiva.com/2494/dcrcwe3-2494735.pdf?src-supplier=Digikey, ComponentLink6URL=https://datasheet.ciiva.com/2494/dcrcwe3-2494735.pdf?src-supplier=Digikey, ComponentLink7Description=https://datasheet.ciiva.com/2494/dcrcwe3-2494736.pdf?src-supplier=Digikey, ComponentLink7URL=https://datasheet.ciiva.com/2494/dcrcwe3-2494736.pdf?src-supplier=Digikey, ComponentLink8Description=https://datasheet.ciiva.com/2494/dcrcwe3-2494737.pdf?src-supplier=Digikey, ComponentLink8URL=https://datasheet.ciiva.com/2494/dcrcwe3-2494737.pdf?src-supplier=Digikey, Construction=Chip, JESD-609 Code=e3, Mounting Technology="Surface Mount", Packaging="Tape and Reel", Pins=2, Pricing="1=0.1, 10=0.026, 50=0.0166, 100=0.014, 500=0.00954, 1000=0.00824 (USD)", Reach SVHC Compliant=Yes, Reference Standard=AEC-Q200, RoHS=Yes, RoHS Compliant=Yes, Stock=46560, Supplier=Digikey, Technology="METAL GLAZE/THICK FILM", Terminal Finish=Nickel, Termination=Wraparound
R17: library part R_1M4_0603, "Fixed Resistor, Metal Glaze/thick Film, 0.1W, 1400000ohm, 75V, 1% +/-Tol, 100ppm/Cel, Surface Mount, 0603", Case/Package=0603, Manufacturer=Vishay, Manufacturer Part Number=CRCW06031M40FKEA, Max Operating Temperature=155°C, Min Operating Temperature=-55°C, Package Height=0.45mm, Package Length=1.55mm, Package Shape=Rectangular, Package Style=SMTMeter, Package Width=0.85mm, Power=100mW, Rated Temperature=70°C, Resistor Type="FIXED RESISTOR", Supplier Part Number=541-1.40MHCT-ND, Temperature Coefficient=100ppm/°C, Tolerance=1%, Working Voltage=75V, Category="Chip SMD Resistors", ComponentLink1Description=https://datasheet.ciiva.com:443/pdfs/VipMasterIC/IC/VISH/VISH-S-A0007266705/VISH-S-A0007266705-1.pdf?src-supplier=IHS+Markit, ComponentLink1URL=https://datasheet.ciiva.com:443/pdfs/VipMasterIC/IC/VISH/VISH-S-A0007266705/VISH-S-A0007266705-1.pdf?src-supplier=IHS+Markit, ComponentLink2Description=https://datasheet.ciiva.com/22702/1697337-22702714.pdf?src-supplier=Element14, ComponentLink2URL=https://datasheet.ciiva.com/22702/1697337-22702714.pdf?src-supplier=Element14, ComponentLink3Description=https://datasheet.ciiva.com/7670/1697337-7670542.pdf?src-supplier=Element14, ComponentLink3URL=https://datasheet.ciiva.com/7670/1697337-7670542.pdf?src-supplier=Element14, ComponentLink4Description=https://datasheet.ciiva.com/7670/1697337-7670543.pdf?src-supplier=Element14, ComponentLink4URL=https://datasheet.ciiva.com/7670/1697337-7670543.pdf?src-supplier=Element14, ComponentLink5Description=https://datasheet.ciiva.com/16215/dcrcwe3-16215401.pdf?src-supplier=Future+Electronics, ComponentLink5URL=https://datasheet.ciiva.com/16215/dcrcwe3-16215401.pdf?src-supplier=Future+Electronics, ComponentLink6Description=https://datasheet.ciiva.com/22870/70201119-22870815.pdf?src-supplier=Allied+Electronics, ComponentLink6URL=https://datasheet.ciiva.com/22870/70201119-22870815.pdf?src-supplier=Allied+Electronics, ComponentLink7Description=https://datasheet.ciiva.com/5541/dcrcwe3-109170-5541158.pdf?src-supplier=Mouser, ComponentLink7URL=https://datasheet.ciiva.com/5541/dcrcwe3-109170-5541158.pdf?src-supplier=Mouser, ComponentLink8Description=https://datasheet.ciiva.com/16785/70201119-16785253.pdf?src-supplier=Allied+Electronics, ComponentLink8URL=https://datasheet.ciiva.com/16785/70201119-16785253.pdf?src-supplier=Allied+Electronics, ComponentLink9Description=https://datasheet.ciiva.com/9102/dcrcwe3-9102326.pdf?src-supplier=Avnet, ComponentLink9URL=https://datasheet.ciiva.com/9102/dcrcwe3-9102326.pdf?src-supplier=Avnet, ComponentLink10Description=https://datasheet.ciiva.com/2466/dcrcwe3-2466344.pdf?src-supplier=Digikey, ComponentLink10URL=https://datasheet.ciiva.com/2466/dcrcwe3-2466344.pdf?src-supplier=Digikey, ComponentLink11Description=https://datasheet.ciiva.com/2466/dcrcwe3-2466345.pdf?src-supplier=Digikey, ComponentLink11URL=https://datasheet.ciiva.com/2466/dcrcwe3-2466345.pdf?src-supplier=Digikey, ComponentLink12Description=https://datasheet.ciiva.com/2466/dcrcwe3-2466346.pdf?src-supplier=Digikey, ComponentLink12URL=https://datasheet.ciiva.com/2466/dcrcwe3-2466346.pdf?src-supplier=Digikey, Construction=Chip, JESD-609 Code=e3, Mounting Technology="Surface Mount", Packaging="Tape and Reel", Pins=2, Pricing="1=0.1, 10=0.026, 50=0.0166, 100=0.014, 500=0.00954, 1000=0.00824 (USD)", Reach SVHC Compliant=Yes, Reference Standard=AEC-Q200, RoHS=Yes, RoHS Compliant=Yes, Stock=34954, Supplier=Digikey, Technology="METAL GLAZE/THICK FILM", Terminal Finish=Nickel, Termination=Wraparound
R18: library part R_8M25_0603, "Fixed Resistor, Metal Glaze/thick Film, 0.1W, 8250000ohm, 75V, 1% +/-Tol, 100ppm/Cel, Surface Mount, 0603", Case/Package=0603, Manufacturer=Vishay, Manufacturer Part Number=CRCW06038M25FKEA, Max Operating Temperature=155°C, Min Operating Temperature=-55°C, Package Height=0.45mm, Package Length=1.55mm, Package Shape=Rectangular, Package Style=SMTMeter, Package Width=0.85mm, Power=100mW, Rated Temperature=70°C, Resistor Type="FIXED RESISTOR", Supplier Part Number=541-8.25MHCT-ND, Temperature Coefficient=100ppm/°C, Tolerance=1%, Working Voltage=75V, Category="Chip SMD Resistors", ComponentLink1Description=https://datasheet.ciiva.com:443/pdfs/VipMasterIC/IC/VISH/VISH-S-A0007266705/VISH-S-A0007266705-1.pdf?src-supplier=IHS+Markit, ComponentLink1URL=https://datasheet.ciiva.com:443/pdfs/VipMasterIC/IC/VISH/VISH-S-A0007266705/VISH-S-A0007266705-1.pdf?src-supplier=IHS+Markit, ComponentLink2Description=https://datasheet.ciiva.com/7748/1697337-7748717.pdf?src-supplier=Element14, ComponentLink2URL=https://datasheet.ciiva.com/7748/1697337-7748717.pdf?src-supplier=Element14, ComponentLink3Description=https://datasheet.ciiva.com/7748/1697337-7748718.pdf?src-supplier=Element14, ComponentLink3URL=https://datasheet.ciiva.com/7748/1697337-7748718.pdf?src-supplier=Element14, ComponentLink4Description=https://datasheet.ciiva.com/2513/dcrcwe3-2513731.pdf?src-supplier=Digikey, ComponentLink4URL=https://datasheet.ciiva.com/2513/dcrcwe3-2513731.pdf?src-supplier=Digikey, ComponentLink5Description=https://datasheet.ciiva.com/2513/dcrcwe3-2513732.pdf?src-supplier=Digikey, ComponentLink5URL=https://datasheet.ciiva.com/2513/dcrcwe3-2513732.pdf?src-supplier=Digikey, ComponentLink6Description=https://datasheet.ciiva.com/2513/dcrcwe3-2513733.pdf?src-supplier=Digikey, ComponentLink6URL=https://datasheet.ciiva.com/2513/dcrcwe3-2513733.pdf?src-supplier=Digikey, Construction=Chip, JESD-609 Code=e3, Mounting Technology="Surface Mount", Packaging="Tape and Reel", Pins=2, Pricing="1=0.1, 10=0.026, 50=0.0166, 100=0.0139, 500=0.0095, 1000=0.00821 (USD)", Reach SVHC Compliant=Yes, Reference Standard=AEC-Q200, RoHS=Yes, RoHS Compliant=Yes, Stock=15579, Supplier=Digikey, Technology="METAL GLAZE/THICK FILM", Terminal Finish=Nickel, Termination=Wraparound
R21: library part R_47K_0603, "Fixed Resistor, Metal Glaze/thick Film, 0.1W, 47000ohm, 75V, 1% +/-Tol, 100ppm/Cel, Surface Mount, 0603", Case/Package=0603, Manufacturer=Yageo, Manufacturer Part Number=RC0603FR-0747KL, Max Operating Temperature=155°C, Min Operating Temperature=-55°C, Package Height=0.45mm, Package Length=1.6mm, Package Shape=Rectangular, Package Style=SMTMeter, Package Width=0.8mm, Power=100mW, Rated Temperature=70°C, Resistor Type="FIXED RESISTOR", Supplier Part Number=311-47.0KHRCT-ND, Temperature Coefficient=100ppm/°C, Tolerance=1%, Working Voltage=75V, Additional Feature="LASER TRIMMABLE", Category="Chip SMD Resistors", ComponentLink1Description=https://datasheet.ciiva.com:443/pdfs/VipMasterIC/IC/YAGO/YAGO-S-A0008145938/YAGO-S-A0008145938-1.pdf?src-supplier=IHS+Markit, ComponentLink1URL=https://datasheet.ciiva.com:443/pdfs/VipMasterIC/IC/YAGO/YAGO-S-A0008145938/YAGO-S-A0008145938-1.pdf?src-supplier=IHS+Markit, ComponentLink2Description=https://datasheet.ciiva.com/11808/0900766b80f96399-11808118.pdf?src-supplier=Rs, ComponentLink2URL=https://datasheet.ciiva.com/11808/0900766b80f96399-11808118.pdf?src-supplier=Rs, ComponentLink3Description=https://datasheet.ciiva.com/2453/pyu-r-int-thick-7-2453932.pdf?src-supplier=Digikey, ComponentLink3URL=https://datasheet.ciiva.com/2453/pyu-r-int-thick-7-2453932.pdf?src-supplier=Digikey, ComponentLink4Description=https://datasheet.ciiva.com/2453/pyu-r-int-thick-7-2453933.pdf?src-supplier=Digikey, ComponentLink4URL=https://datasheet.ciiva.com/2453/pyu-r-int-thick-7-2453933.pdf?src-supplier=Digikey, ComponentLink5Description=https://datasheet.ciiva.com/2453/pyu-r-int-thick-7-2453931.pdf?src-supplier=Digikey, ComponentLink5URL=https://datasheet.ciiva.com/2453/pyu-r-int-thick-7-2453931.pdf?src-supplier=Digikey, ComponentLink6Description=https://datasheet.ciiva.com/7746/443971-7746362.pdf?src-supplier=Element14, ComponentLink6URL=https://datasheet.ciiva.com/7746/443971-7746362.pdf?src-supplier=Element14, ComponentLink7Description=https://datasheet.ciiva.com/7746/443971-7746361.pdf?src-supplier=Element14, ComponentLink7URL=https://datasheet.ciiva.com/7746/443971-7746361.pdf?src-supplier=Element14, Construction=Chip, JESD-609 Code=e3, Mounting Technology="Surface Mount", Packaging="Tape and Reel", Pins=2, Pricing="1=0.1, 10=0.019, 50=0.0112, 100=0.0093, 500=0.00622, 1000=0.00532 (USD)", Reach SVHC Compliant=Yes, RoHS=Yes, RoHS Compliant=Yes, Stock=9516223, Supplier=Digikey, Technology="METAL GLAZE/THICK FILM", Terminal Finish=Nickel, Termination=Wraparound
R22: library part R_140_0603, "RES 140OHM 0.1w 0603", Case/Package=0603, Manufacturer=Yageo, Manufacturer Part Number=RC0603FR-07140RL, Max Operating Temperature=155°C, Min Operating Temperature=-55°C, Package Height=0.45mm, Package Length=1.6mm, Package Shape=Rectangular, Package Style=SMTMeter, Package Width=0.8mm, Power=100mW, Rated Temperature=70°C, Resistor Type="FIXED RESISTOR", Supplier Part Number=311-140HRCT-ND, Temperature Coefficient=100ppm/°C, Tolerance=1%, Working Voltage=75V, Additional Feature="LASER TRIMMABLE", Category="Chip SMD Resistors", ComponentLink1Description=https://datasheet.ciiva.com:443/pdfs/VipMasterIC/IC/YAGO/YAGO-S-A0008145938/YAGO-S-A0008145938-1.pdf?src-supplier=IHS+Markit, ComponentLink1URL=https://datasheet.ciiva.com:443/pdfs/VipMasterIC/IC/YAGO/YAGO-S-A0008145938/YAGO-S-A0008145938-1.pdf?src-supplier=IHS+Markit, ComponentLink2Description=https://datasheet.ciiva.com/11808/0900766b80c66297-11808828.pdf?src-supplier=Rs, ComponentLink2URL=https://datasheet.ciiva.com/11808/0900766b80c66297-11808828.pdf?src-supplier=Rs, ComponentLink3Description=https://datasheet.ciiva.com/15189/getdatasheetpartid-329205-15189606.pdf?src-supplier=Verical, ComponentLink3URL=https://datasheet.ciiva.com/15189/getdatasheetpartid-329205-15189606.pdf?src-supplier=Verical, Construction=Chip, JESD-609 Code=e3, Mounting Technology="Surface Mount", Packaging="Tape and Reel", Pins=2, Pricing="1=0.1, 10=0.019, 50=0.0112, 100=0.0093, 500=0.00622, 1000=0.00532 (USD)", Reach SVHC Compliant=Yes, RoHS=Yes, RoHS Compliant=Yes, Stock=298380, Supplier=Digikey, Technology="METAL GLAZE/THICK FILM", Terminal Finish=Nickel, Termination=Wraparound